# EAGLE board LibreServo_v1_b (EAGLE 9.2.0)
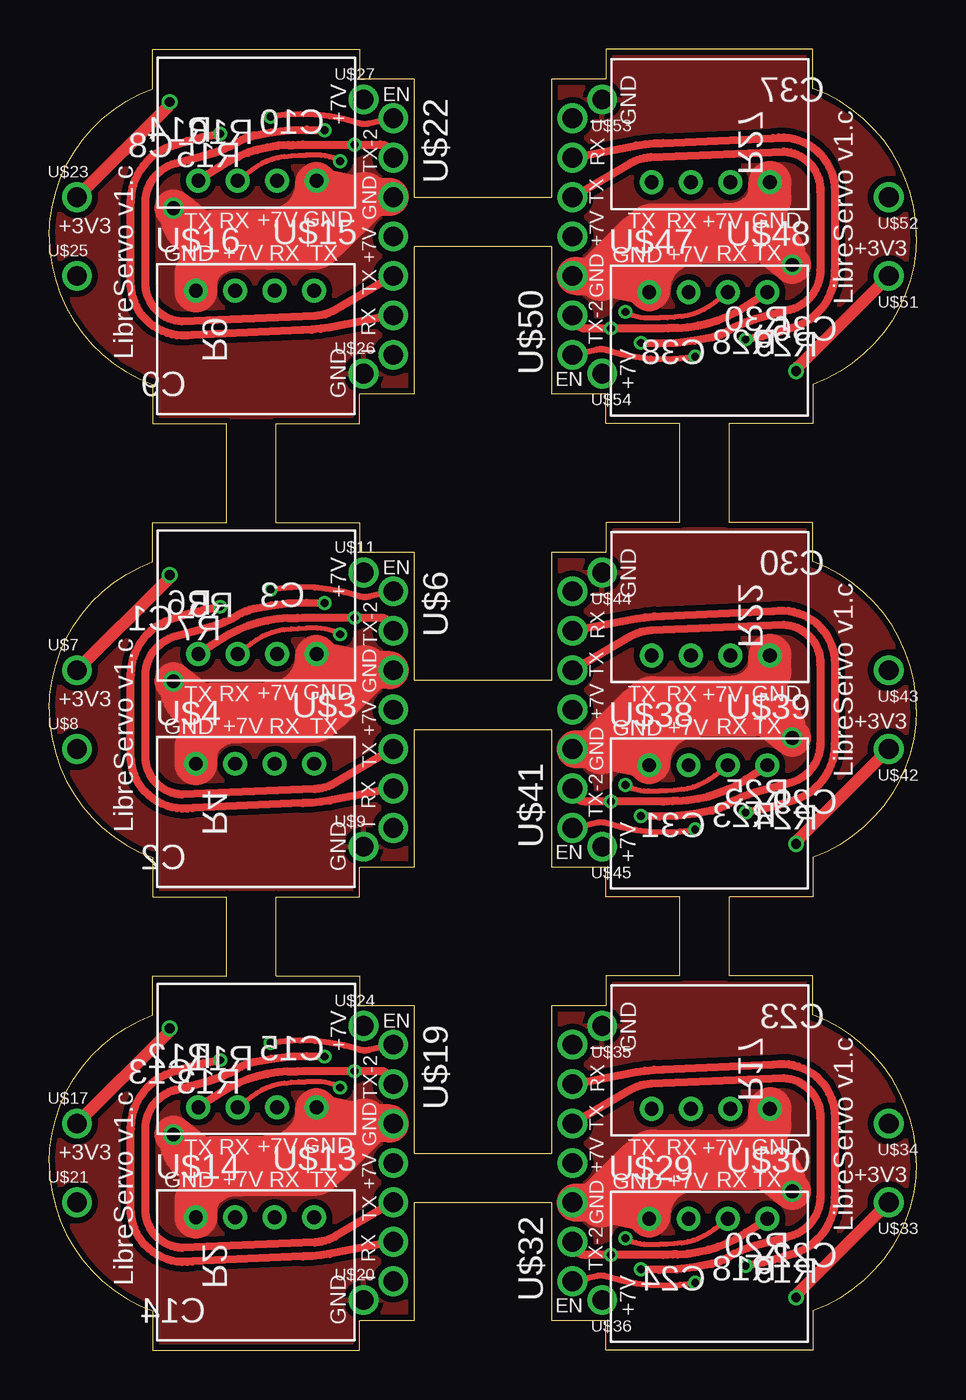
[diagram p0: board, top side]
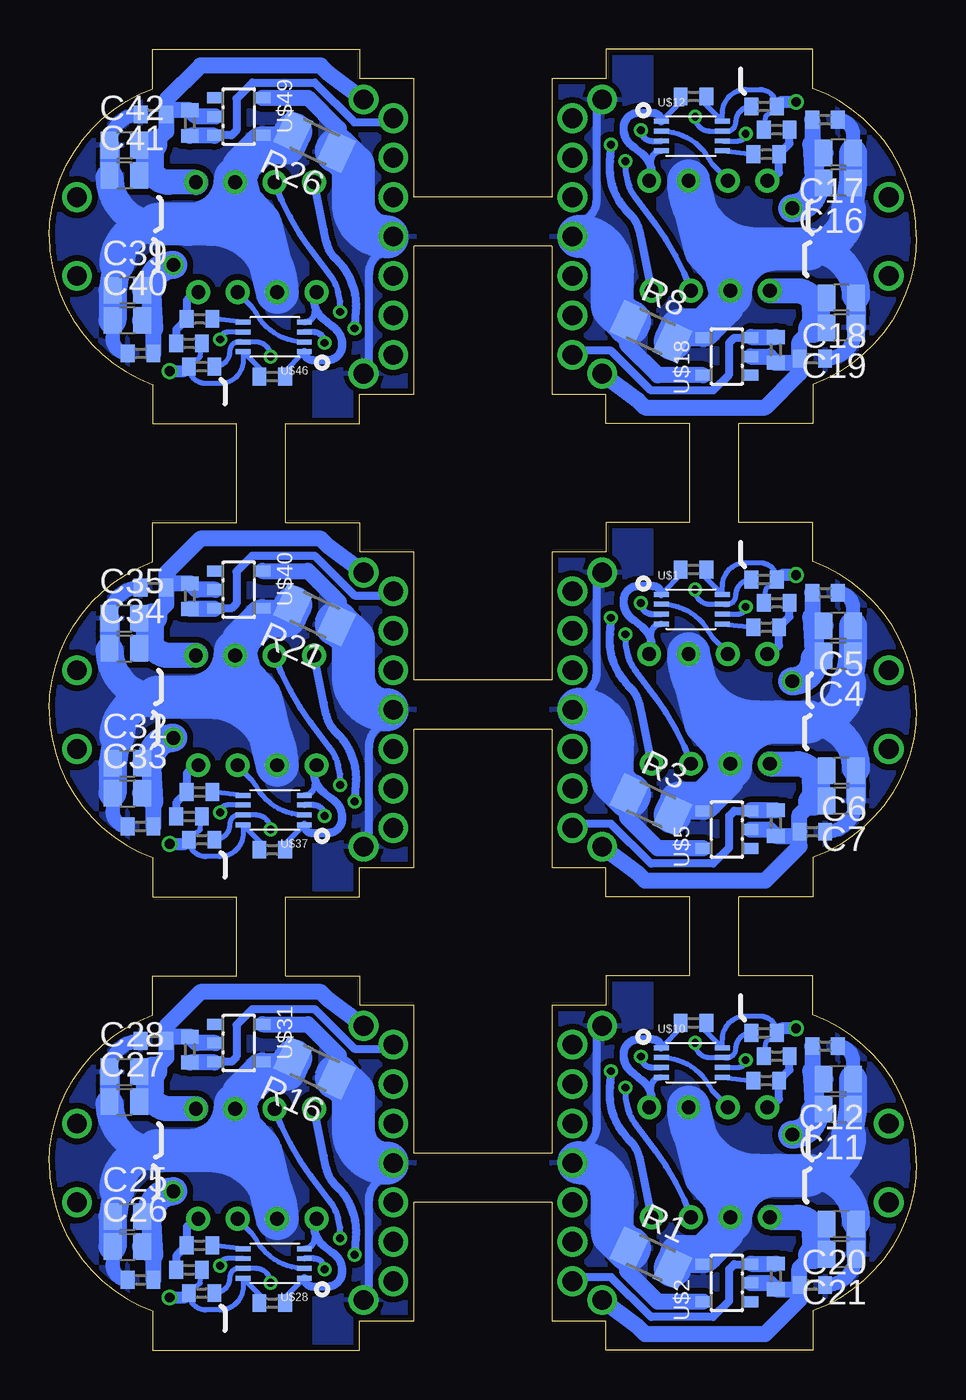
[diagram p1: board, bottom side, seen from below]

Size 44 x 66 mm. Coordinates in mm from the lower left corner, seen from the top.
Outline: 15.75,17.5 18.5,17.5 18.5,10 25.5,10 25.5,17.5 28.25,17.5 28.25,19 32,19 32,23 28.25,23 28.25,24.5 25.5,24.5 25.5,31.5 18.5,31.5 18.5,24.5 15.75,24.5 15.75,23 11.5,23 11.5,19 15.75,19 15.75,17.5
Outline: 18.5,7.5 18.5,1.5 15.75,1.5 15.75,0 5.25,0 5.25,2 arc-70 0,9.5 arc-70 5.25,17 5.25,19 9,19 9,23 5.25,23 5.25,25 arc-70 0,32.5 arc-70 5.25,40 5.25,42 9,42 9,47 5.25,47 5.25,49 arc-70 0,56.5 arc-70 5.25,64 5.25,66 15.75,66 15.75,64.5 18.5,64.5 18.5,58.5 25.5,58.5 25.5,64.5 28.25,64.5 28.25,66 38.75,66 38.75,64 arc-70 44,56.5 arc-70 38.75,49 38.75,47 34.5,47 34.5,42 38.75,42 38.75,40 arc-70 44,32.5 arc-70 38.75,25 38.75,23 34.5,23 34.5,19 38.75,19 38.75,17 arc-70 44,9.5 arc-70 38.75,2 38.75,0 28.25,0 28.25,1.5 25.5,1.5 25.5,7.5 18.5,7.5
Outline: 15.75,40.5 18.5,40.5 18.5,34 25.5,34 25.5,40.5 28.25,40.5 28.25,42 32,42 32,47 28.25,47 28.25,48.5 25.5,48.5 25.5,56 18.5,56 18.5,48.5 15.75,48.5 15.75,47 11.5,47 11.5,42 15.75,42 15.75,40.5
Copper layers (1*16): Top 0.035mm / dielectric 1.5mm / Bottom 0.035mm
Design rules "ITEADstudio_DRC": minimum track width 6mil, minimum drill 12mil, track to track 6mil, track to pad 6mil, pad to pad 6mil, via to via 6mil, smd to smd 0mil, copper to edge 10mil, drill to drill 10mil, minimum pad ring 10mil, minimum via ring 6mil, stop-mask expansion 2mil, vias tented up to drill 100mil, thermal gap 10mil

## Footprints (pad centres in the part's own frame; a part is rotated, then mirrored left to right if it is on the bottom)
C0402 = smd 0.7 x 0.9: 1 -0.65,0; 2 0.65,0
0805_MIN = smd 0.9 x 1.35: 1 -0.75,0; 2 0.75,0
1206_ESTRECHA = smd 1.4 x 1.8: 1 -1.2,0; 2 1.2,0
R0402 = smd 0.7 x 0.9: 1 -0.65,0; 2 0.65,0
VSSOP-8 = smd 0.75 x 0.25: P$1 -1.55,0.75; P$2 -1.55,0.25; P$3 -1.55,-0.25; P$4 -1.55,-0.75; P$5 1.55,-0.75; P$6 1.55,-0.25; P$7 1.55,0.25; P$8 1.55,0.75
SOT25 = smd 0.55 x 0.8: 1 -0.95,-1.2; 2 0,-1.2; 3 0.95,-1.2; 4 0.95,1.2; 5 -0.95,1.2
JST_PH-4_HOLE = drill 0.7: P$1 1.95,6.25; P$2 3.95,6.25; P$3 5.95,6.25; P$4 7.95,6.25
HEADER_7_MIN = drill 1: P$1 0,0; P$2 2,0; P$3 4,0; P$4 6,0; P$5 8,0; P$6 10,0; P$7 12,0
HEADER_1_MIN = drill 1: P$1 0,0

## Placement (x,y rotation side)
C1  100nF  [C0402]  4.64,38.43 180 bottom
C2  100nF  [C0402]  5.28,26.3 180 bottom
C3  100nF  [C0402]  11.31,39.61 180 bottom
C4  22uF  [0805_MIN]  3.96,35.22 180 bottom
C5  22uF  [0805_MIN]  3.96,36.75 180 bottom
C6  22uF  [0805_MIN]  3.81,29.39 180 bottom
C7  22uF  [0805_MIN]  3.81,27.87 180 bottom
C8  100nF  [C0402]  4.64,62.43 180 bottom
C9  100nF  [C0402]  5.28,50.3 180 bottom
C10  100nF  [C0402]  11.31,63.61 180 bottom
C11  22uF  [0805_MIN]  3.96,12.22 180 bottom
C12  22uF  [0805_MIN]  3.96,13.75 180 bottom
C13  100nF  [C0402]  4.64,15.43 180 bottom
C14  100nF  [C0402]  5.28,3.3 180 bottom
C15  100nF  [C0402]  11.31,16.61 180 bottom
C16  22uF  [0805_MIN]  3.96,59.22 180 bottom
C17  22uF  [0805_MIN]  3.96,60.75 180 bottom
C18  22uF  [0805_MIN]  3.81,53.39 180 bottom
C19  22uF  [0805_MIN]  3.81,51.87 180 bottom
C20  22uF  [0805_MIN]  3.81,6.39 180 bottom
C21  22uF  [0805_MIN]  3.81,4.87 180 bottom
C22  100nF  [C0402]  39.36,3.57 0 bottom
C23  100nF  [C0402]  38.72,15.7 0 bottom
C24  100nF  [C0402]  32.69,2.39 0 bottom
C25  22uF  [0805_MIN]  40.04,6.78 0 bottom
C26  22uF  [0805_MIN]  40.04,5.25 0 bottom
C27  22uF  [0805_MIN]  40.19,12.61 0 bottom
C28  22uF  [0805_MIN]  40.19,14.13 0 bottom
C29  100nF  [C0402]  39.36,26.57 0 bottom
C30  100nF  [C0402]  38.72,38.7 0 bottom
C31  100nF  [C0402]  32.69,25.39 0 bottom
C32  22uF  [0805_MIN]  40.04,29.78 0 bottom
C33  22uF  [0805_MIN]  40.04,28.25 0 bottom
C34  22uF  [0805_MIN]  40.19,35.61 0 bottom
C35  22uF  [0805_MIN]  40.19,37.13 0 bottom
C36  100nF  [C0402]  39.36,50.57 0 bottom
C37  100nF  [C0402]  38.72,62.7 0 bottom
C38  100nF  [C0402]  32.69,49.39 0 bottom
C39  22uF  [0805_MIN]  40.04,53.78 0 bottom
C40  22uF  [0805_MIN]  40.04,52.25 0 bottom
C41  22uF  [0805_MIN]  40.19,59.61 0 bottom
C42  22uF  [0805_MIN]  40.19,61.13 0 bottom
R1  0.02  [1206_ESTRECHA]  13.47,4.68 335 bottom
R2  1k1  [R0402]  7.14,3.75 90 bottom
R3  0.02  [1206_ESTRECHA]  13.47,27.68 335 bottom
R4  1k1  [R0402]  7.14,26.75 90 bottom
R5  10K  [R0402]  7.73,39.1 180 bottom
R6  100  [R0402]  7.62,36.68 0 bottom
R7  100K  [R0402]  7.09,37.92 180 bottom
R8  0.02  [1206_ESTRECHA]  13.47,51.68 335 bottom
R9  1k1  [R0402]  7.14,50.75 90 bottom
R10  10K  [R0402]  7.73,63.1 180 bottom
R11  10K  [R0402]  7.73,16.1 180 bottom
R12  100  [R0402]  7.62,13.68 0 bottom
R13  100K  [R0402]  7.09,14.92 180 bottom
R14  100  [R0402]  7.62,60.68 0 bottom
R15  100K  [R0402]  7.09,61.92 180 bottom
R16  0.02  [1206_ESTRECHA]  30.53,14.32 155 bottom
R17  1k1  [R0402]  36.86,15.25 270 bottom
R18  10K  [R0402]  36.27,2.9 0 bottom
R19  100  [R0402]  36.38,5.32 180 bottom
R20  100K  [R0402]  36.91,4.08 0 bottom
R21  0.02  [1206_ESTRECHA]  30.53,37.32 155 bottom
R22  1k1  [R0402]  36.86,38.25 270 bottom
R23  10K  [R0402]  36.27,25.9 0 bottom
R24  100  [R0402]  36.38,28.32 180 bottom
R25  100K  [R0402]  36.91,27.08 0 bottom
R26  0.02  [1206_ESTRECHA]  30.53,61.32 155 bottom
R27  1k1  [R0402]  36.86,62.25 270 bottom
R28  10K  [R0402]  36.27,49.9 0 bottom
R29  100  [R0402]  36.38,52.32 180 bottom
R30  100K  [R0402]  36.91,51.08 0 bottom
U$1  SN74LVC2G125  [VSSOP-8]  11.39,37.6 0 bottom
U$2  ZXCT1010  [SOT25]  9.62,3.41 90 bottom
U$3  JST_PH-4  [JST_PH-4_HOLE]  15.51,41.58 180 top
U$4  JST_PH-4  [JST_PH-4_HOLE]  5.49,23.5 0 top
U$5  ZXCT1010  [SOT25]  9.62,26.41 90 bottom
U$6  HEADER_7_MIN  [HEADER_7_MIN]  17.45,38.5 270 top
U$7  HEADER_1_MIN  [HEADER_1_MIN]  1.4,34.5 0 top
U$8  HEADER_1_MIN  [HEADER_1_MIN]  1.4,30.5 0 top
U$9  HEADER_1_MIN  [HEADER_1_MIN]  15.95,25.55 0 top
U$10  SN74LVC2G125  [VSSOP-8]  11.39,14.6 0 bottom
U$11  HEADER_1_MIN  [HEADER_1_MIN]  15.95,39.45 0 top
U$12  SN74LVC2G125  [VSSOP-8]  11.39,61.6 0 bottom
U$13  JST_PH-4  [JST_PH-4_HOLE]  15.51,18.58 180 top
U$14  JST_PH-4  [JST_PH-4_HOLE]  5.49,0.5 0 top
U$15  JST_PH-4  [JST_PH-4_HOLE]  15.51,65.58 180 top
U$16  JST_PH-4  [JST_PH-4_HOLE]  5.49,47.5 0 top
U$17  HEADER_1_MIN  [HEADER_1_MIN]  1.4,11.5 0 top
U$18  ZXCT1010  [SOT25]  9.62,50.41 90 bottom
U$19  HEADER_7_MIN  [HEADER_7_MIN]  17.45,15.5 270 top
U$20  HEADER_1_MIN  [HEADER_1_MIN]  15.95,2.55 0 top
U$21  HEADER_1_MIN  [HEADER_1_MIN]  1.4,7.5 0 top
U$22  HEADER_7_MIN  [HEADER_7_MIN]  17.45,62.5 270 top
U$23  HEADER_1_MIN  [HEADER_1_MIN]  1.4,58.5 0 top
U$24  HEADER_1_MIN  [HEADER_1_MIN]  15.95,16.45 0 top
U$25  HEADER_1_MIN  [HEADER_1_MIN]  1.4,54.5 0 top
U$26  HEADER_1_MIN  [HEADER_1_MIN]  15.95,49.55 0 top
U$27  HEADER_1_MIN  [HEADER_1_MIN]  15.95,63.45 0 top
U$28  SN74LVC2G125  [VSSOP-8]  32.61,4.4 180 bottom
U$29  JST_PH-4  [JST_PH-4_HOLE]  28.49,0.42 0 top
U$30  JST_PH-4  [JST_PH-4_HOLE]  38.51,18.5 180 top
U$31  ZXCT1010  [SOT25]  34.38,15.59 270 bottom
U$32  HEADER_7_MIN  [HEADER_7_MIN]  26.55,3.5 90 top
U$33  HEADER_1_MIN  [HEADER_1_MIN]  42.6,7.5 180 top
U$34  HEADER_1_MIN  [HEADER_1_MIN]  42.6,11.5 180 top
U$35  HEADER_1_MIN  [HEADER_1_MIN]  28.05,16.45 180 top
U$36  HEADER_1_MIN  [HEADER_1_MIN]  28.05,2.55 180 top
U$37  SN74LVC2G125  [VSSOP-8]  32.61,27.4 180 bottom
U$38  JST_PH-4  [JST_PH-4_HOLE]  28.49,23.42 0 top
U$39  JST_PH-4  [JST_PH-4_HOLE]  38.51,41.5 180 top
U$40  ZXCT1010  [SOT25]  34.38,38.59 270 bottom
U$41  HEADER_7_MIN  [HEADER_7_MIN]  26.55,26.5 90 top
U$42  HEADER_1_MIN  [HEADER_1_MIN]  42.6,30.5 180 top
U$43  HEADER_1_MIN  [HEADER_1_MIN]  42.6,34.5 180 top
U$44  HEADER_1_MIN  [HEADER_1_MIN]  28.05,39.45 180 top
U$45  HEADER_1_MIN  [HEADER_1_MIN]  28.05,25.55 180 top
U$46  SN74LVC2G125  [VSSOP-8]  32.61,51.4 180 bottom
U$47  JST_PH-4  [JST_PH-4_HOLE]  28.49,47.42 0 top
U$48  JST_PH-4  [JST_PH-4_HOLE]  38.51,65.5 180 top
U$49  ZXCT1010  [SOT25]  34.38,62.59 270 bottom
U$50  HEADER_7_MIN  [HEADER_7_MIN]  26.55,50.5 90 top
U$51  HEADER_1_MIN  [HEADER_1_MIN]  42.6,54.5 180 top
U$52  HEADER_1_MIN  [HEADER_1_MIN]  42.6,58.5 180 top
U$53  HEADER_1_MIN  [HEADER_1_MIN]  28.05,63.45 180 top
U$54  HEADER_1_MIN  [HEADER_1_MIN]  28.05,49.55 180 top

## Library data of the parts
C1-C3 C8-C10 C13-C15 C22-C24 C29-C31 C36-C38 R2 R4-R7 R9-R15 R17-R20 R22-R25 R27-R30 = rcl
C4-C7 C11 C12 C16-C21 C25-C28 C32-C35 C39-C42 R1 R3 R8 R16 R21 R26 U$1-U$54 = Propio

## Nets
+3V3_1: C3.1 R5.1 R7.2 U$1.P$8 U$7.P$1
+3V3_2: C15.1 R11.1 R13.2 U$10.P$8 U$17.P$1
+3V3_3: C10.1 R10.1 R15.2 U$12.P$8 U$23.P$1
+3V3_4: C24.1 R18.1 R20.2 U$28.P$8 U$33.P$1
+3V3_5: C31.1 R23.1 R25.2 U$37.P$8 U$42.P$1
+3V3_6: C38.1 R28.1 R30.2 U$46.P$8 U$51.P$1
+7V_1: R3.1 U$5.5 U$6.P$4 U$11.P$1
+7V_2: R1.1 U$2.5 U$19.P$4 U$24.P$1
+7V_2_CABLE: C11.1 C12.1 C13.1 C14.1 C20.1 C21.1 R1.2 U$2.4 U$13.P$2 U$14.P$2
+7V_2_CABLE1: C1.1 C2.1 C4.1 C5.1 C6.1 C7.1 R3.2 U$3.P$2 U$4.P$2 U$5.4
+7V_2_CABLE2: C8.1 C9.1 C16.1 C17.1 C18.1 C19.1 R8.2 U$15.P$2 U$16.P$2 U$18.4
+7V_2_CABLE3: C22.1 C23.1 C25.1 C26.1 C27.1 C28.1 R16.2 U$29.P$2 U$30.P$2 U$31.4
+7V_2_CABLE4: C29.1 C30.1 C32.1 C33.1 C34.1 C35.1 R21.2 U$38.P$2 U$39.P$2 U$40.4
+7V_2_CABLE5: C36.1 C37.1 C39.1 C40.1 C41.1 C42.1 R26.2 U$47.P$2 U$48.P$2 U$49.4
+7V_3: R8.1 U$18.5 U$22.P$4 U$27.P$1
+7V_4: R16.1 U$31.5 U$32.P$4 U$36.P$1
+7V_5: R21.1 U$40.5 U$41.P$4 U$45.P$1
+7V_6: R26.1 U$49.5 U$50.P$4 U$54.P$1
EN_SERIAL_1: R5.2 U$1.P$7 U$6.P$1
EN_SERIAL_2: R11.2 U$10.P$7 U$19.P$1
EN_SERIAL_3: R10.2 U$12.P$7 U$22.P$1
EN_SERIAL_4: R18.2 U$28.P$7 U$32.P$1
EN_SERIAL_5: R23.2 U$37.P$7 U$41.P$1
EN_SERIAL_6: R28.2 U$46.P$7 U$50.P$1
GND1: C1.2 C2.2 C3.2 C4.2 C5.2 C6.2 C7.2 R4.1 U$1.P$1 U$1.P$4 U$3.P$1 U$4.P$1 U$5.2 U$6.P$3 U$9.P$1
GND2: C11.2 C12.2 C13.2 C14.2 C15.2 C20.2 C21.2 R2.1 U$2.2 U$10.P$1 U$10.P$4 U$13.P$1 U$14.P$1 U$19.P$3 U$20.P$1
GND3: C8.2 C9.2 C10.2 C16.2 C17.2 C18.2 C19.2 R9.1 U$12.P$1 U$12.P$4 U$15.P$1 U$16.P$1 U$18.2 U$22.P$3 U$26.P$1
GND4: C22.2 C23.2 C24.2 C25.2 C26.2 C27.2 C28.2 R17.1 U$28.P$1 U$28.P$4 U$29.P$1 U$30.P$1 U$31.2 U$32.P$3 U$35.P$1
GND5: C29.2 C30.2 C31.2 C32.2 C33.2 C34.2 C35.2 R22.1 U$37.P$1 U$37.P$4 U$38.P$1 U$39.P$1 U$40.2 U$41.P$3 U$44.P$1
GND6: C36.2 C37.2 C38.2 C39.2 C40.2 C41.2 C42.2 R27.1 U$46.P$1 U$46.P$4 U$47.P$1 U$48.P$1 U$49.2 U$50.P$3 U$53.P$1
N$1: R6.1 U$1.P$5
N$2: R14.1 U$12.P$5
N$3: R19.1 U$28.P$5
N$4: R24.1 U$37.P$5
N$5: R29.1 U$46.P$5
N$8: R12.1 U$10.P$5
RX_1: U$1.P$6 U$6.P$6
RX_2: U$10.P$6 U$19.P$6
RX_2_CABLE: U$10.P$2 U$13.P$3 U$14.P$3
RX_2_CABLE1: U$1.P$2 U$3.P$3 U$4.P$3
RX_2_CABLE2: U$12.P$2 U$15.P$3 U$16.P$3
RX_2_CABLE3: U$28.P$2 U$29.P$3 U$30.P$3
RX_2_CABLE4: U$37.P$2 U$38.P$3 U$39.P$3
RX_2_CABLE5: U$46.P$2 U$47.P$3 U$48.P$3
RX_3: U$12.P$6 U$22.P$6
RX_4: U$28.P$6 U$32.P$6
RX_5: U$37.P$6 U$41.P$6
RX_6: U$46.P$6 U$50.P$6
TX_1: U$1.P$3 U$6.P$5
TX_2: U$10.P$3 U$19.P$5
TX_2_CABLE: R12.2 R13.1 U$13.P$4 U$14.P$4 U$19.P$2
TX_2_CABLE1: R6.2 R7.1 U$3.P$4 U$4.P$4 U$6.P$2
TX_2_CABLE2: R14.2 R15.1 U$15.P$4 U$16.P$4 U$22.P$2
TX_2_CABLE3: R19.2 R20.1 U$29.P$4 U$30.P$4 U$32.P$2
TX_2_CABLE4: R24.2 R25.1 U$38.P$4 U$39.P$4 U$41.P$2
TX_2_CABLE5: R29.2 R30.1 U$47.P$4 U$48.P$4 U$50.P$2
TX_3: U$12.P$3 U$22.P$5
TX_4: U$28.P$3 U$32.P$5
TX_5: U$37.P$3 U$41.P$5
TX_6: U$46.P$3 U$50.P$5
V_CORRIENTE_1: R4.2 U$5.3 U$6.P$7
V_CORRIENTE_2: R2.2 U$2.3 U$19.P$7
V_CORRIENTE_3: R9.2 U$18.3 U$22.P$7
V_CORRIENTE_4: R17.2 U$31.3 U$32.P$7
V_CORRIENTE_5: R22.2 U$40.3 U$41.P$7
V_CORRIENTE_6: R27.2 U$49.3 U$50.P$7
V_POT_1: U$8.P$1
V_POT_2: U$21.P$1
V_POT_3: U$25.P$1
V_POT_4: U$34.P$1
V_POT_5: U$43.P$1
V_POT_6: U$52.P$1

## Tracks (layer width: path | path; a pad name or v marks a point on that pad's centre or on a via)
+3V3_1  (via drill 0.5)
  Top 0.61: U$7.P$1 6.07,39.17 6.07,39.29 v6.1,39.32
  Bottom 0.254: C3.1 10.88,39.38 U$1.P$8 9.84,38.78 arc90 8.66,39.95 7.94,39.95 arc90 R5.1 7.66,38.58 R7.2
  Bottom 0.61: v6.1,39.32 6.86,39.32 R5.1
+3V3_2  (via drill 0.5)
  Top 0.61: U$17.P$1 6.07,16.17 6.07,16.29 v6.1,16.32
  Bottom 0.254: C15.1 10.88,16.38 U$10.P$8 9.84,15.78 arc90 8.66,16.95 7.94,16.95 arc90 R11.1 7.66,15.58 R13.2
  Bottom 0.61: v6.1,16.32 6.86,16.32 R11.1
+3V3_3  (via drill 0.5)
  Top 0.61: U$23.P$1 6.07,63.17 6.07,63.29 v6.1,63.32
  Bottom 0.254: C10.1 10.88,63.38 U$12.P$8 9.84,62.78 arc90 8.66,63.95 7.94,63.95 arc90 R10.1 7.66,62.58 R15.2
  Bottom 0.61: v6.1,63.32 6.86,63.32 R10.1
+3V3_4  (via drill 0.5)
  Top 0.61: U$33.P$1 37.93,2.83 37.93,2.71 v37.9,2.68
  Bottom 0.254: C24.1 33.12,2.62 U$28.P$8 34.16,3.22 arc90 35.34,2.05 36.06,2.05 arc90 R18.1 36.34,3.42 R20.2
  Bottom 0.61: v37.9,2.68 37.14,2.68 R18.1
+3V3_5  (via drill 0.5)
  Top 0.61: U$42.P$1 37.93,25.83 37.93,25.71 v37.9,25.68
  Bottom 0.254: C31.1 33.12,25.62 U$37.P$8 34.16,26.22 arc90 35.34,25.05 36.06,25.05 arc90 R23.1 36.34,26.42 R25.2
  Bottom 0.61: v37.9,25.68 37.14,25.68 R23.1
+3V3_6  (via drill 0.5)
  Top 0.61: U$51.P$1 37.93,49.83 37.93,49.71 v37.9,49.68
  Bottom 0.254: C38.1 33.12,49.62 U$46.P$8 34.16,50.22 arc90 35.34,49.05 36.06,49.05 arc90 R28.1 36.34,50.42 R30.2
  Bottom 0.61: v37.9,49.68 37.14,49.68 R28.1
+7V_1
  Bottom 0.406: U$11.P$1 16.23,39.17 16.23,34.37 arc90 17.48,33.12 17.48,32.53 arc-90 U$6.P$4 17.16,32.5 arc-90 17.15,32.51
  Bottom 0.813: U$5.5 13.12,25.46 14.68,27.02 R3.1
  Bottom 1.422: U$6.P$4 17.24,32.5
  Bottom 2.184: 17.15,32.51 arc90 15.42,30.79 15.42,28.91 14.59,28.07 R3.1
  pour Bottom (isolate 0.305): 13.5,23 15.5,23 15.5,25 18.5,25 18.5,40 18.5,41 15.5,41 15.5,42 13.5,42
+7V_2
  Bottom 0.406: U$24.P$1 16.23,16.17 16.23,11.37 arc90 17.48,10.12 17.48,9.53 arc-90 U$19.P$4 17.16,9.5 arc-90 17.15,9.51
  Bottom 0.813: U$2.5 13.12,2.46 14.68,4.03 R1.1
  Bottom 1.422: U$19.P$4 17.24,9.5
  Bottom 2.184: 17.15,9.51 arc90 15.42,7.79 15.42,5.91 14.59,5.08 R1.1
  pour Bottom (isolate 0.305): 13.5,0 15.5,0 15.5,2 18.5,2 18.5,17 18.5,18 15.5,18 15.5,19 13.5,19
+7V_2_CABLE
  Bottom 0.711: C14.1 C14.1 arc-90 C21.1 | C12.1 3.21,14.65 arc-90 C13.1
  Bottom 0.813: R1.2 11.26,4.81 U$2.4
  Bottom 1.016: 3.06,6.5 C20.1 C21.1
  Bottom 1.422: 3.06,6.5 arc-90 5.44,8.88 | 3.43,10.88 C11.1 C12.1
  Bottom 1.676: 5.46,8.88 5.44,8.88
  Bottom 1.778: 5.44,8.88 arc-90 3.43,10.88
  Bottom 1.93: R1.2 12.06,4.88 10.8,4.88 9.71,5.96 9.71,6.12 9.55,6.29 9.44,6.55 U$14.P$2
  Bottom 2.184: 6.96,8.88 8.11,8.88 arc90 U$13.P$2 10.69,8.82 9.69,7.72 U$14.P$2 | 6.96,8.88 5.46,8.88 | 9.44,6.55 arc90 7.11,8.88 6.96,8.88
  pour Bottom (isolate 0.305, rank 2): 5.25,17 arc70 0,9.5 arc70 5.25,2 5.25,0 13.06,0 13.06,4.19 13.06,14.81 13.06,19 5.25,19
+7V_2_CABLE1
  Bottom 0.711: C2.1 C2.1 arc-90 C7.1 | C5.1 3.21,37.65 arc-90 C1.1
  Bottom 0.813: R3.2 11.26,27.81 U$5.4
  Bottom 1.016: 3.06,29.5 C6.1 C7.1
  Bottom 1.422: 3.06,29.5 arc-90 5.44,31.88 | 3.43,33.88 C4.1 C5.1
  Bottom 1.676: 5.46,31.88 5.44,31.88
  Bottom 1.778: 5.44,31.88 arc-90 3.43,33.88
  Bottom 1.93: R3.2 12.06,27.88 10.8,27.88 9.71,28.96 9.71,29.12 9.55,29.29 9.44,29.55 U$4.P$2
  Bottom 2.184: 6.96,31.88 8.11,31.88 arc90 U$3.P$2 10.69,31.82 9.69,30.72 U$4.P$2 | 6.96,31.88 5.46,31.88 | 9.44,29.55 arc90 7.11,31.88 6.96,31.88
  pour Bottom (isolate 0.305, rank 2): 5.25,40 arc70 0,32.5 arc70 5.25,25 5.28,23.46 13.08,23.46 13.06,27.19 13.06,42 5.25,42
+7V_2_CABLE2
  Bottom 0.711: C9.1 C9.1 arc-90 C19.1 | C17.1 3.21,61.65 arc-90 C8.1
  Bottom 0.813: R8.2 11.26,51.81 U$18.4
  Bottom 1.016: 3.06,53.5 C18.1 C19.1
  Bottom 1.422: 3.06,53.5 arc-90 5.44,55.88 | 3.43,57.88 C16.1 C17.1
  Bottom 1.676: 5.46,55.88 5.44,55.88
  Bottom 1.778: 5.44,55.88 arc-90 3.43,57.88
  Bottom 1.93: R8.2 12.06,51.88 10.8,51.88 9.71,52.96 9.71,53.12 9.55,53.29 9.44,53.55 U$16.P$2
  Bottom 2.184: 6.96,55.88 8.11,55.88 arc90 U$15.P$2 10.69,55.82 9.69,54.72 U$16.P$2 | 6.96,55.88 5.46,55.88 | 9.44,53.55 arc90 7.11,55.88 6.96,55.88
  pour Bottom (isolate 0.305, rank 2): 5.25,64 arc70 0,56.5 arc70 5.25,49 5.33,47.33 13.13,47.33 13.06,51.19 13.06,66 5.25,66
+7V_2_CABLE3
  Bottom 0.711: C23.1 C23.1 arc-90 C28.1 | C26.1 40.79,4.35 arc-90 C22.1
  Bottom 0.813: R16.2 32.74,14.19 U$31.4
  Bottom 1.016: 40.94,12.5 C27.1 C28.1
  Bottom 1.422: 40.94,12.5 arc-90 38.56,10.12 | 40.57,8.12 C25.1 C26.1
  Bottom 1.676: 38.54,10.12 38.56,10.12
  Bottom 1.778: 38.56,10.12 arc-90 40.57,8.12
  Bottom 1.93: R16.2 31.94,14.12 33.2,14.12 34.28,13.04 34.28,12.88 34.45,12.71 34.56,12.45 U$30.P$2
  Bottom 2.184: 37.04,10.12 35.89,10.12 arc90 U$29.P$2 33.31,10.18 34.31,11.28 U$30.P$2 | 37.04,10.12 38.54,10.12 | 34.56,12.45 arc90 36.89,10.12 37.04,10.12
  pour Bottom (isolate 0.305, rank 2): 38.75,2 arc70 44,9.5 arc70 38.75,17 38.7,18.64 30.89,18.64 30.94,14.81 30.94,0 38.75,0
+7V_2_CABLE4
  Bottom 0.711: C30.1 C30.1 arc-90 C35.1 | C33.1 40.79,27.35 arc-90 C29.1
  Bottom 0.813: R21.2 32.74,37.19 U$40.4
  Bottom 1.016: 40.94,35.5 C34.1 C35.1
  Bottom 1.422: 40.94,35.5 arc-90 38.56,33.12 | 40.57,31.12 C32.1 C33.1
  Bottom 1.676: 38.54,33.12 38.56,33.12
  Bottom 1.778: 38.56,33.12 arc-90 40.57,31.12
  Bottom 1.93: R21.2 31.94,37.12 33.2,37.12 34.28,36.04 34.28,35.88 34.45,35.71 34.56,35.45 U$39.P$2
  Bottom 2.184: 37.04,33.12 35.89,33.12 arc90 U$38.P$2 33.31,33.18 34.31,34.28 U$39.P$2 | 37.04,33.12 38.54,33.12 | 34.56,35.45 arc90 36.89,33.12 37.04,33.12
  pour Bottom (isolate 0.305, rank 2): 38.75,25 arc70 44,32.5 arc70 38.75,40 38.78,41.62 30.97,41.62 30.94,37.81 30.94,23 38.75,23
+7V_2_CABLE5
  Bottom 0.711: C37.1 C37.1 arc-90 C42.1 | C40.1 40.79,51.35 arc-90 C36.1
  Bottom 0.813: R26.2 32.74,61.19 U$49.4
  Bottom 1.016: 40.94,59.5 C41.1 C42.1
  Bottom 1.422: 40.94,59.5 arc-90 38.56,57.12 | 40.57,55.12 C39.1 C40.1
  Bottom 1.676: 38.54,57.12 38.56,57.12
  Bottom 1.778: 38.56,57.12 arc-90 40.57,55.12
  Bottom 1.93: R26.2 31.94,61.12 33.2,61.12 34.28,60.04 34.28,59.88 34.45,59.71 34.56,59.45 U$48.P$2
  Bottom 2.184: 37.04,57.12 35.89,57.12 arc90 U$47.P$2 33.31,57.18 34.31,58.28 U$48.P$2 | 37.04,57.12 38.54,57.12 | 34.56,59.45 arc90 36.89,57.12 37.04,57.12
  pour Bottom (isolate 0.305, rank 2): 38.75,49 arc70 44,56.5 arc70 38.75,64 38.75,66 30.94,66 30.94,61.81 30.94,51.19 30.94,47 38.75,47
+7V_3
  Bottom 0.406: U$27.P$1 16.23,63.17 16.23,58.37 arc90 17.48,57.12 17.48,56.53 arc-90 U$22.P$4 17.16,56.5 arc-90 17.15,56.51
  Bottom 0.813: U$18.5 13.12,49.46 14.68,51.02 R8.1
  Bottom 1.422: U$22.P$4 17.24,56.5
  Bottom 2.184: 17.15,56.51 arc90 15.42,54.78 15.42,52.91 14.59,52.08 R8.1
  pour Bottom (isolate 0.305): 13.5,47 15.5,47 15.5,49 18.5,49 18.5,64 18.5,65 15.5,65 15.5,66 13.5,66
+7V_4
  Bottom 0.406: U$36.P$1 27.77,2.83 27.77,7.63 arc90 26.52,8.88 26.52,9.47 arc-90 U$32.P$4 26.84,9.5 arc-90 26.85,9.49
  Bottom 0.813: U$31.5 30.88,16.54 29.32,14.97 R16.1
  Bottom 1.422: U$32.P$4 26.76,9.5
  Bottom 2.184: 26.85,9.49 arc90 28.58,11.21 28.58,13.1 29.41,13.93 R16.1
  pour Bottom (isolate 0.305): 30.5,19 28.5,19 28.5,17 25.5,17 25.5,2 25.5,1 28.5,1 28.5,0 30.5,0
+7V_5
  Bottom 0.406: U$45.P$1 27.77,25.83 27.77,30.63 arc90 26.52,31.88 26.52,32.47 arc-90 U$41.P$4 26.84,32.5 arc-90 26.85,32.49
  Bottom 0.813: U$40.5 30.88,39.54 29.32,37.98 R21.1
  Bottom 1.422: U$41.P$4 26.76,32.5
  Bottom 2.184: 26.85,32.49 arc90 28.58,34.22 28.58,36.09 29.41,36.92 R21.1
  pour Bottom (isolate 0.305): 30.5,42 28.5,42 28.5,40 25.5,40 25.5,25 25.5,24 28.5,24 28.5,23 30.5,23
+7V_6
  Bottom 0.406: U$54.P$1 27.77,49.83 27.77,54.63 arc90 26.52,55.88 26.52,56.47 arc-90 U$50.P$4 26.84,56.5 arc-90 26.85,56.49
  Bottom 0.813: U$49.5 30.88,63.54 29.32,61.98 R26.1
  Bottom 1.422: U$50.P$4 26.76,56.5
  Bottom 2.184: 26.85,56.49 arc90 28.58,58.22 28.58,60.09 29.41,60.92 R26.1
  pour Bottom (isolate 0.305): 30.5,66 28.5,66 28.5,64 25.5,64 25.5,49 25.5,48 28.5,48 28.5,47 30.5,47
EN_SERIAL_1  (via drill 0.4)
  Top 0.305: U$6.P$1 16.23,38.23 arc-31 15.7,38.25 arc28 v11.23,38.58
  Bottom 0.254: R5.2 R5.2 arc-90 9.17,38.3 arc110 9.82,37.85 U$1.P$7 10.5,37.85 arc90 v11.23,38.58
EN_SERIAL_2  (via drill 0.4)
  Top 0.305: U$19.P$1 16.23,15.23 arc-31 15.7,15.25 arc28 v11.23,15.58
  Bottom 0.254: R11.2 R11.2 arc-90 9.17,15.3 arc110 9.82,14.85 U$10.P$7 10.5,14.85 arc90 v11.23,15.58
EN_SERIAL_3  (via drill 0.4)
  Top 0.305: U$22.P$1 16.23,62.23 arc-31 15.7,62.25 arc28 v11.23,62.58
  Bottom 0.254: R10.2 R10.2 arc-90 9.17,62.3 arc110 9.82,61.85 U$12.P$7 10.5,61.85 arc90 v11.23,62.58
EN_SERIAL_4  (via drill 0.4)
  Top 0.305: U$32.P$1 27.77,3.77 arc-31 28.3,3.75 arc28 v32.77,3.42
  Bottom 0.254: R18.2 R18.2 arc-90 34.83,3.7 arc110 34.18,4.15 U$28.P$7 33.5,4.15 arc90 v32.77,3.42
EN_SERIAL_5  (via drill 0.4)
  Top 0.305: U$41.P$1 27.77,26.77 arc-31 28.3,26.75 arc28 v32.77,26.42
  Bottom 0.254: R23.2 R23.2 arc-90 34.83,26.7 arc110 34.18,27.15 U$37.P$7 33.5,27.15 arc90 v32.77,26.42
EN_SERIAL_6  (via drill 0.4)
  Top 0.305: U$50.P$1 27.77,50.77 arc-31 28.3,50.75 arc28 v32.77,50.42
  Bottom 0.254: R28.2 R28.2 arc-90 34.83,50.7 arc110 34.18,51.15 U$46.P$7 33.5,51.15 arc90 v32.77,50.42
GND1  (via drill 0.7)
  Top 0.254: 13.39,32.33 13.61,32.56
  Top 0.406: U$6.P$3 17.28,34.5
  Top 1.422: 7.99,32.02 arc-90 6.3,33.71 v6.3,33.93 6.3,33.96 | U$3.P$1 U$6.P$3
  Top 1.93: 17.28,34.5 15.98,34.5 | 7.55,30.69 7.55,31.58 7.99,32.02 8.31,32.33 v6.3,33.93 | U$3.P$1 13.56,35.17 | U$4.P$1 arc-90 9.46,31.77 9.78,31.77 11.23,32.36
  Top 2.184: 13.56,35.17 arc-90 11.23,32.84 11.23,32.36 arc-90 11.2,32.33 | 7.55,30.69 arc90 7.44,30.57 U$4.P$1
  Top 2.54: 15.98,34.5 14.04,32.56 13.61,32.56
  Top 3.048: 13.39,32.33 11.2,32.33 8.31,32.33
  Bottom 0.254: C3.2 11.84,39.45 U$1.P$1
  Bottom 0.305: C2.2 5.96,26.3 5.97,26.31 6.2,26.54 | U$1.P$4 arc-90 13.45,36.34 13.45,35.84 13.45,35.44 arc90 U$3.P$1
  Bottom 0.406: U$1.P$1 arc-90 13.35,38.76 14.12,38.76 arc-90 14.86,38.02 14.86,37.95 arc-61 14.33,37.03 13.92,36.7 arc61 13.45,35.44
  Bottom 0.711: 5.28,27.82 4.61,27.82 arc-90 C7.2 | 5.11,28.8 5.11,28.84 arc90 C6.2
  Bottom 0.813: C1.2 5.29,37.17 | U$9.P$1 14.15,24.21 13.77,23.82 7.67,23.82 5.93,25.57 C2.2 | C2.2 6.14,26.1 R4.1 7.46,26.41 U$5.2 | C2.2 5.93,27.17 5.28,27.82
  Bottom 1.016: C5.2 5.29,37.17 5.17,35.07 C4.2
  Bottom 1.27: U$4.P$1 6.06,29.75 arc90 5.11,28.8
  Bottom 1.422: 5.17,35.07 arc90 v6.3,33.93 | 5.11,28.84 5.11,27.99 arc90 5.28,27.82
  pour Top (isolate 0.305): 15.75,23.41 5.25,23.41 5.25,25 arc-70 0,32.5 arc-70 5.25,40 5.25,42 15.75,42 15.75,40.5 18.5,40.5 18.5,24.5 15.75,24.5
GND2  (via drill 0.7)
  Top 0.254: 13.39,9.33 13.61,9.56
  Top 0.406: U$19.P$3 17.28,11.5
  Top 1.422: 7.99,9.02 arc-90 6.3,10.71 v6.3,10.93 6.3,10.96 | U$13.P$1 U$19.P$3
  Top 1.93: 17.28,11.5 15.98,11.5 | 7.55,7.69 7.55,8.57 7.99,9.02 8.31,9.33 v6.3,10.93 | U$13.P$1 13.56,12.17 | U$14.P$1 arc-90 9.46,8.78 9.78,8.78 11.23,9.36
  Top 2.184: 13.56,12.17 arc-90 11.23,9.84 11.23,9.36 arc-90 11.2,9.33 | 7.55,7.69 arc90 7.44,7.57 U$14.P$1
  Top 2.54: 15.98,11.5 14.04,9.56 13.61,9.56
  Top 3.048: 13.39,9.33 11.2,9.33 8.31,9.33
  Bottom 0.254: C15.2 11.84,16.45 U$10.P$1
  Bottom 0.305: C14.2 5.96,3.3 5.97,3.31 6.2,3.54 | U$10.P$4 arc-90 13.45,13.34 13.45,12.84 13.45,12.44 arc90 U$13.P$1
  Bottom 0.406: U$10.P$1 arc-90 13.35,15.76 14.12,15.76 arc-90 14.86,15.02 14.86,14.95 arc-61 14.33,14.03 13.92,13.7 arc61 13.45,12.44
  Bottom 0.711: 5.28,4.82 4.61,4.82 arc-90 C21.2 | 5.11,5.8 5.11,5.83 arc90 C20.2
  Bottom 0.813: C13.2 5.29,14.17 | U$20.P$1 14.15,1.21 13.77,0.82 7.67,0.82 5.93,2.57 C14.2 | C14.2 6.14,3.1 R2.1 7.46,3.41 U$2.2 | C14.2 5.93,4.17 5.28,4.82
  Bottom 1.016: C12.2 5.29,14.17 5.17,12.07 C11.2
  Bottom 1.27: U$14.P$1 6.06,6.75 arc90 5.11,5.8
  Bottom 1.422: 5.17,12.07 arc90 v6.3,10.93 | 5.11,5.83 5.11,4.99 arc90 5.28,4.82
  pour Top (isolate 0.305): 15.75,0 5.25,0 5.25,2 arc-70 0,9.5 arc-70 5.25,17 5.25,19 15.75,19 15.75,17.5 18.5,17.5 18.5,1.5 15.75,1.5
GND3  (via drill 0.7)
  Top 0.254: 13.39,56.33 13.61,56.56
  Top 0.406: U$22.P$3 17.28,58.5
  Top 1.422: 7.99,56.02 arc-90 6.3,57.71 v6.3,57.93 6.3,57.96 | U$15.P$1 U$22.P$3
  Top 1.93: 17.28,58.5 15.98,58.5 | 7.55,54.69 7.55,55.58 7.99,56.02 8.31,56.33 v6.3,57.93 | U$15.P$1 13.56,59.17 | U$16.P$1 arc-90 9.46,55.77 9.78,55.77 11.23,56.36
  Top 2.184: 13.56,59.17 arc-90 11.23,56.84 11.23,56.36 arc-90 11.2,56.33 | 7.55,54.69 arc90 7.44,54.57 U$16.P$1
  Top 2.54: 15.98,58.5 14.04,56.56 13.61,56.56
  Top 3.048: 13.39,56.33 11.2,56.33 8.31,56.33
  Bottom 0.254: C10.2 11.84,63.45 U$12.P$1
  Bottom 0.305: C9.2 5.96,50.3 5.97,50.31 6.2,50.54 | U$12.P$4 arc-90 13.45,60.34 13.45,59.84 13.45,59.44 arc90 U$15.P$1
  Bottom 0.406: U$12.P$1 arc-90 13.35,62.76 14.12,62.76 arc-90 14.86,62.02 14.86,61.95 arc-61 14.33,61.03 13.92,60.7 arc61 13.45,59.44
  Bottom 0.711: 5.28,51.82 4.61,51.82 arc-90 C19.2 | 5.11,52.8 5.11,52.84 arc90 C18.2
  Bottom 0.813: C8.2 5.29,61.17 | U$26.P$1 14.15,48.21 13.77,47.83 7.67,47.83 5.93,49.57 C9.2 | C9.2 6.14,50.1 R9.1 7.46,50.41 U$18.2 | C9.2 5.93,51.17 5.28,51.82
  Bottom 1.016: C17.2 5.29,61.17 5.17,59.07 C16.2
  Bottom 1.27: U$16.P$1 6.06,53.75 arc90 5.11,52.8
  Bottom 1.422: 5.17,59.07 arc90 v6.3,57.93 | 5.11,52.84 5.11,51.99 arc90 5.28,51.82
  pour Top (isolate 0.305): 15.75,47.33 5.25,47.33 5.25,49 arc-70 0,56.5 arc-70 5.25,64 5.25,66 15.75,66 15.75,64.5 18.5,64.5 18.5,48.5 15.75,48.5
GND4  (via drill 0.7)
  Top 0.254: 30.61,9.67 30.39,9.44
  Top 0.406: U$32.P$3 26.72,7.5
  Top 1.422: 36.01,9.98 arc-90 37.7,8.29 v37.7,8.07 37.7,8.04 | U$29.P$1 U$32.P$3
  Top 1.93: 26.72,7.5 28.02,7.5 | 36.45,11.31 36.45,10.43 36.01,9.98 35.69,9.67 v37.7,8.07 | U$29.P$1 30.44,6.83 | U$30.P$1 arc-90 34.54,10.22 34.22,10.22 32.77,9.64
  Top 2.184: 30.44,6.83 arc-90 32.77,9.16 32.77,9.64 arc-90 32.8,9.67 | 36.45,11.31 arc90 36.56,11.43 U$30.P$1
  Top 2.54: 28.02,7.5 29.96,9.44 30.39,9.44
  Top 3.048: 30.61,9.67 32.8,9.67 35.69,9.67
  Bottom 0.254: C24.2 32.16,2.55 U$28.P$1
  Bottom 0.305: C23.2 38.04,15.7 38.03,15.69 37.8,15.46 | U$28.P$4 arc-90 30.55,5.66 30.55,6.16 30.55,6.56 arc90 U$29.P$1
  Bottom 0.406: U$28.P$1 arc-90 30.65,3.24 29.88,3.24 arc-90 29.14,3.98 29.14,4.05 arc-61 29.67,4.97 30.08,5.3 arc61 30.55,6.56
  Bottom 0.711: 38.72,14.18 39.39,14.18 arc-90 C28.2 | 38.89,13.2 38.89,13.16 arc90 C27.2
  Bottom 0.813: C22.2 38.72,4.83 | U$35.P$1 29.85,17.79 30.23,18.18 36.33,18.18 38.07,16.43 C23.2 | C23.2 37.86,15.9 R17.1 36.55,15.59 U$31.2 | C23.2 38.07,14.83 38.72,14.18
  Bottom 1.016: C26.2 38.72,4.83 38.83,6.93 C25.2
  Bottom 1.27: U$30.P$1 37.94,12.25 arc90 38.89,13.2
  Bottom 1.422: 38.83,6.93 arc90 v37.7,8.07 | 38.89,13.16 38.89,14.01 arc90 38.72,14.18
  pour Top (isolate 0.305): 28.25,18.64 38.75,18.64 38.75,17 arc-70 44,9.5 arc-70 38.75,2 38.75,0 28.25,0 28.25,1.5 25.5,1.5 25.5,17.5 28.25,17.5
GND5  (via drill 0.7)
  Top 0.254: 30.61,32.67 30.39,32.44
  Top 0.406: U$41.P$3 26.72,30.5
  Top 1.422: 36.01,32.98 arc-90 37.7,31.29 v37.7,31.07 37.7,31.04 | U$38.P$1 U$41.P$3
  Top 1.93: 26.72,30.5 28.02,30.5 | 36.45,34.31 36.45,33.42 36.01,32.98 35.69,32.67 v37.7,31.07 | U$38.P$1 30.44,29.83 | U$39.P$1 arc-90 34.54,33.23 34.22,33.23 32.77,32.64
  Top 2.184: 30.44,29.83 arc-90 32.77,32.16 32.77,32.64 arc-90 32.8,32.67 | 36.45,34.31 arc90 36.56,34.43 U$39.P$1
  Top 2.54: 28.02,30.5 29.96,32.44 30.39,32.44
  Top 3.048: 30.61,32.67 32.8,32.67 35.69,32.67
  Bottom 0.254: C31.2 32.16,25.55 U$37.P$1
  Bottom 0.305: C30.2 38.04,38.7 38.03,38.69 37.8,38.46 | U$37.P$4 arc-90 30.55,28.66 30.55,29.16 30.55,29.56 arc90 U$38.P$1
  Bottom 0.406: U$37.P$1 arc-90 30.65,26.24 29.88,26.24 arc-90 29.14,26.98 29.14,27.05 arc-61 29.67,27.97 30.08,28.3 arc61 30.55,29.56
  Bottom 0.711: 38.72,37.18 39.39,37.18 arc-90 C35.2 | 38.89,36.2 38.89,36.16 arc90 C34.2
  Bottom 0.813: C29.2 38.72,27.83 | U$44.P$1 29.85,40.79 30.23,41.17 36.33,41.17 38.07,39.43 C30.2 | C30.2 37.86,38.9 R22.1 36.55,38.59 U$40.2 | C30.2 38.07,37.83 38.72,37.18
  Bottom 1.016: C33.2 38.72,27.83 38.83,29.93 C32.2
  Bottom 1.27: U$39.P$1 37.94,35.25 arc90 38.89,36.2
  Bottom 1.422: 38.83,29.93 arc90 v37.7,31.07 | 38.89,36.16 38.89,37.01 arc90 38.72,37.18
  pour Top (isolate 0.305): 28.25,41.64 38.75,41.64 38.75,40 arc-70 44,32.5 arc-70 38.75,25 38.75,23 28.25,23 28.25,24.5 25.5,24.5 25.5,40.5 28.25,40.5
GND6  (via drill 0.7)
  Top 0.254: 30.61,56.67 30.39,56.44
  Top 0.406: U$50.P$3 26.72,54.5
  Top 1.422: 36.01,56.98 arc-90 37.7,55.29 v37.7,55.07 37.7,55.04 | U$47.P$1 U$50.P$3
  Top 1.93: 26.72,54.5 28.02,54.5 | 36.45,58.31 36.45,57.42 36.01,56.98 35.69,56.67 v37.7,55.07 | U$47.P$1 30.44,53.83 | U$48.P$1 arc-90 34.54,57.23 34.22,57.23 32.77,56.64
  Top 2.184: 30.44,53.83 arc-90 32.77,56.16 32.77,56.64 arc-90 32.8,56.67 | 36.45,58.31 arc90 36.56,58.43 U$48.P$1
  Top 2.54: 28.02,54.5 29.96,56.44 30.39,56.44
  Top 3.048: 30.61,56.67 32.8,56.67 35.69,56.67
  Bottom 0.254: C38.2 32.16,49.55 U$46.P$1
  Bottom 0.305: C37.2 38.04,62.7 38.03,62.69 37.8,62.46 | U$46.P$4 arc-90 30.55,52.66 30.55,53.16 30.55,53.56 arc90 U$47.P$1
  Bottom 0.406: U$46.P$1 arc-90 30.65,50.24 29.88,50.24 arc-90 29.14,50.98 29.14,51.05 arc-61 29.67,51.97 30.08,52.3 arc61 30.55,53.56
  Bottom 0.711: 38.72,61.18 39.39,61.18 arc-90 C42.2 | 38.89,60.2 38.89,60.16 arc90 C41.2
  Bottom 0.813: C36.2 38.72,51.83 | U$53.P$1 29.85,64.79 30.23,65.17 36.33,65.17 38.07,63.43 C37.2 | C37.2 37.86,62.9 R27.1 36.55,62.59 U$49.2 | C37.2 38.07,61.83 38.72,61.18
  Bottom 1.016: C40.2 38.72,51.83 38.83,53.93 C39.2
  Bottom 1.27: U$48.P$1 37.94,59.25 arc90 38.89,60.2
  Bottom 1.422: 38.83,53.93 arc90 v37.7,55.07 | 38.89,60.16 38.89,61.01 arc90 38.72,61.18
  pour Top (isolate 0.305): 28.25,66 38.75,66 38.75,64 arc-70 44,56.5 arc-70 38.75,49 38.75,47 28.25,47 28.25,48.5 25.5,48.5 25.5,64.5 28.25,64.5
N$1
  Bottom 0.254: U$1.P$5 R6.1
N$2
  Bottom 0.254: U$12.P$5 R14.1
N$3
  Bottom 0.254: U$28.P$5 R19.1
N$4
  Bottom 0.254: U$37.P$5 R24.1
N$5
  Bottom 0.254: U$46.P$5 R29.1
N$8
  Bottom 0.254: U$10.P$5 R12.1
RX_1  (via drill 0.4)
  Top 0.406: U$6.P$6 14.23,27.89 arc-11 12.86,27.76 7.27,27.51 arc-95 4.14,29.98 4.14,34.25 arc-71 6.15,37.08 arc-10 v8.66,37.72
  Bottom 0.254: U$1.P$6 9.04,37.35 arc-90 v8.66,37.72
RX_2  (via drill 0.4)
  Top 0.406: U$19.P$6 14.23,4.89 arc-11 12.86,4.76 7.27,4.51 arc-95 4.14,6.98 4.14,11.25 arc-71 6.15,14.08 arc-10 v8.66,14.72
  Bottom 0.254: U$10.P$6 9.04,14.35 arc-90 v8.66,14.72
RX_2_CABLE  (via drill 0.4)
  Top 0.254: v14.76,13.32 arc30 13.62,13.63 13.03,13.63 arc8 11.92,13.55 arc29 10.27,12.87 U$13.P$3
  Bottom 0.254: U$10.P$2 12.8,14.85 arc55 10.57,13.52 arc-26 9.73,12.59 U$13.P$3
  Bottom 0.305: U$14.P$3 arc-17 13.26,10.15 14.23,11.44 arc29 14.66,12.31 14.76,12.78 v14.76,13.32
RX_2_CABLE1  (via drill 0.4)
  Top 0.254: v14.76,36.32 arc30 13.62,36.63 13.03,36.63 arc8 11.92,36.55 arc29 10.27,35.87 U$3.P$3
  Bottom 0.254: U$1.P$2 12.8,37.85 arc55 10.57,36.52 arc-26 9.73,35.59 U$3.P$3
  Bottom 0.305: U$4.P$3 arc-17 13.26,33.15 14.23,34.44 arc29 14.66,35.31 14.76,35.78 v14.76,36.32
RX_2_CABLE2  (via drill 0.4)
  Top 0.254: v14.76,60.32 arc30 13.62,60.63 13.03,60.63 arc8 11.92,60.55 arc29 10.27,59.87 U$15.P$3
  Bottom 0.254: U$12.P$2 12.8,61.85 arc55 10.57,60.52 arc-26 9.73,59.59 U$15.P$3
  Bottom 0.305: U$16.P$3 arc-17 13.26,57.15 14.23,58.44 arc29 14.66,59.31 14.76,59.78 v14.76,60.32
RX_2_CABLE3  (via drill 0.4)
  Top 0.254: v29.24,5.68 arc30 30.38,5.37 30.97,5.37 arc8 32.08,5.45 arc29 33.73,6.13 U$29.P$3
  Bottom 0.254: U$28.P$2 31.2,4.15 arc55 33.43,5.48 arc-26 34.27,6.42 U$29.P$3
  Bottom 0.305: U$30.P$3 arc-17 30.74,8.85 29.77,7.56 arc29 29.34,6.69 29.24,6.22 v29.24,5.68
RX_2_CABLE4  (via drill 0.4)
  Top 0.254: v29.24,28.68 arc30 30.38,28.37 30.97,28.37 arc8 32.08,28.45 arc29 33.73,29.14 U$38.P$3
  Bottom 0.254: U$37.P$2 31.2,27.15 arc55 33.43,28.48 arc-26 34.27,29.41 U$38.P$3
  Bottom 0.305: U$39.P$3 arc-17 30.74,31.85 29.77,30.56 arc29 29.34,29.69 29.24,29.22 v29.24,28.68
RX_2_CABLE5  (via drill 0.4)
  Top 0.254: v29.24,52.68 arc30 30.38,52.37 30.97,52.37 arc8 32.08,52.45 arc29 33.73,53.13 U$47.P$3
  Bottom 0.254: U$46.P$2 31.2,51.15 arc55 33.43,52.48 arc-26 34.27,53.41 U$47.P$3
  Bottom 0.305: U$48.P$3 arc-17 30.74,55.85 29.77,54.56 arc29 29.34,53.69 29.24,53.22 v29.24,52.68
RX_3  (via drill 0.4)
  Top 0.406: U$22.P$6 14.23,51.89 arc-11 12.86,51.76 7.27,51.51 arc-95 4.14,53.98 4.14,58.25 arc-71 6.15,61.08 arc-10 v8.66,61.72
  Bottom 0.254: U$12.P$6 9.04,61.35 arc-90 v8.66,61.72
RX_4  (via drill 0.4)
  Top 0.406: U$32.P$6 29.77,14.11 arc-11 31.14,14.24 36.73,14.49 arc-95 39.86,12.02 39.86,7.75 arc-71 37.85,4.92 arc-10 v35.34,4.28
  Bottom 0.254: U$28.P$6 34.97,4.65 arc-90 v35.34,4.28
RX_5  (via drill 0.4)
  Top 0.406: U$41.P$6 29.77,37.11 arc-11 31.14,37.24 36.73,37.49 arc-95 39.86,35.02 39.86,30.75 arc-71 37.85,27.92 arc-10 v35.34,27.28
  Bottom 0.254: U$37.P$6 34.97,27.65 arc-90 v35.34,27.28
RX_6  (via drill 0.4)
  Top 0.406: U$50.P$6 29.77,61.11 arc-11 31.14,61.24 36.73,61.49 arc-95 39.86,59.02 39.86,54.75 arc-71 37.85,51.92 arc-10 v35.34,51.28
  Bottom 0.254: U$46.P$6 34.97,51.65 arc-90 v35.34,51.28
TX_1  (via drill 0.4)
  Top 0.406: U$6.P$5 14.51,28.78 arc-28 13.46,28.47 6.73,28.19 arc-90 4.88,30.22 4.88,34.22 arc-75 6.4,36.22 8.18,36.7 arc16 9.55,37.29 arc-18 10.37,37.62 arc-18 v13.97,37.9
  Bottom 0.305: v13.97,37.9 arc-90 13.43,37.35 U$1.P$3
TX_2  (via drill 0.4)
  Top 0.406: U$19.P$5 14.51,5.78 arc-28 13.46,5.47 6.73,5.19 arc-90 4.88,7.22 4.88,11.22 arc-75 6.4,13.22 8.18,13.7 arc16 9.55,14.29 arc-18 10.37,14.62 arc-18 v13.97,14.9
  Bottom 0.305: v13.97,14.9 arc-90 13.43,14.35 U$10.P$3
TX_2_CABLE  (via drill 0.4)
  Top 0.406: U$19.P$2 arc90 16.79,14.16 v15.5,14.16 12.86,14.16 arc0 12.12,14.13 arc31 8.66,13.04 U$13.P$4
  Bottom 0.406: R13.1 6.44,14.21 R12.2 6.97,12.73 U$13.P$4 | v15.5,14.16 arc4 15.55,13.32 arc-52 14.53,10.63 arc35 14.05,9.77 13.92,9.16 U$14.P$4
TX_2_CABLE1  (via drill 0.4)
  Top 0.406: U$6.P$2 arc90 16.79,37.16 v15.5,37.16 12.86,37.16 arc0 12.12,37.13 arc31 8.66,36.04 U$3.P$4
  Bottom 0.406: R7.1 6.44,37.21 R6.2 6.97,35.73 U$3.P$4 | v15.5,37.16 arc4 15.55,36.32 arc-52 14.53,33.63 arc35 14.05,32.77 13.92,32.16 U$4.P$4
TX_2_CABLE2  (via drill 0.4)
  Top 0.406: U$22.P$2 arc90 16.79,61.16 v15.5,61.16 12.86,61.16 arc0 12.12,61.13 arc31 8.66,60.04 U$15.P$4
  Bottom 0.406: R15.1 6.44,61.21 R14.2 6.97,59.73 U$15.P$4 | v15.5,61.16 arc4 15.55,60.32 arc-52 14.53,57.63 arc35 14.05,56.77 13.92,56.16 U$16.P$4
TX_2_CABLE3  (via drill 0.4)
  Top 0.406: U$32.P$2 arc90 27.21,4.84 v28.5,4.84 31.14,4.84 arc0 31.88,4.87 arc31 35.34,5.96 U$29.P$4
  Bottom 0.406: R20.1 37.56,4.79 R19.2 37.03,6.27 U$29.P$4 | v28.5,4.84 arc4 28.45,5.68 arc-52 29.47,8.37 arc35 29.95,9.23 30.08,9.84 U$30.P$4
TX_2_CABLE4  (via drill 0.4)
  Top 0.406: U$41.P$2 arc90 27.21,27.84 v28.5,27.84 31.14,27.84 arc0 31.88,27.86 arc31 35.34,28.96 U$38.P$4
  Bottom 0.406: R25.1 37.56,27.79 R24.2 37.03,29.27 U$38.P$4 | v28.5,27.84 arc4 28.45,28.68 arc-52 29.47,31.37 arc35 29.95,32.23 30.08,32.84 U$39.P$4
TX_2_CABLE5  (via drill 0.4)
  Top 0.406: U$50.P$2 arc90 27.21,51.84 v28.5,51.84 31.14,51.84 arc0 31.88,51.87 arc31 35.34,52.96 U$47.P$4
  Bottom 0.406: R30.1 37.56,51.79 R29.2 37.03,53.27 U$47.P$4 | v28.5,51.84 arc4 28.45,52.68 arc-52 29.47,55.37 arc35 29.95,56.23 30.08,56.84 U$48.P$4
TX_3  (via drill 0.4)
  Top 0.406: U$22.P$5 14.51,52.78 arc-28 13.46,52.47 6.73,52.19 arc-90 4.88,54.22 4.88,58.22 arc-75 6.4,60.22 8.18,60.7 arc16 9.55,61.29 arc-18 10.37,61.62 arc-18 v13.97,61.9
  Bottom 0.305: v13.97,61.9 arc-90 13.43,61.35 U$12.P$3
TX_4  (via drill 0.4)
  Top 0.406: U$32.P$5 29.49,13.22 arc-28 30.54,13.53 37.27,13.81 arc-90 39.12,11.78 39.12,7.78 arc-75 37.6,5.78 35.82,5.3 arc16 34.45,4.71 arc-18 33.63,4.38 arc-18 v30.03,4.1
  Bottom 0.305: v30.03,4.1 arc-90 30.57,4.65 U$28.P$3
TX_5  (via drill 0.4)
  Top 0.406: U$41.P$5 29.49,36.22 arc-28 30.54,36.53 37.27,36.81 arc-90 39.12,34.78 39.12,30.78 arc-75 37.6,28.78 35.82,28.3 arc16 34.45,27.71 arc-18 33.63,27.38 arc-18 v30.03,27.1
  Bottom 0.305: v30.03,27.1 arc-90 30.57,27.65 U$37.P$3
TX_6  (via drill 0.4)
  Top 0.406: U$50.P$5 29.49,60.22 arc-28 30.54,60.53 37.27,60.81 arc-90 39.12,58.78 39.12,54.78 arc-75 37.6,52.78 35.82,52.3 arc16 34.45,51.71 arc-18 33.63,51.38 arc-18 v30.03,51.1
  Bottom 0.305: v30.03,51.1 arc-90 30.57,51.65 U$46.P$3
V_CORRIENTE_1
  Bottom 0.406: U$6.P$7 17.08,26.5 16.87,26.71 15.49,26.71 13.47,24.69 10.31,24.69 9.5,25.5 9.5,27.11 9.25,27.36 U$5.3
  Bottom 0.61: U$5.3 arc90 8.38,27.4
  Bottom 0.813: 8.38,27.4 R4.2
V_CORRIENTE_2
  Bottom 0.406: U$19.P$7 17.08,3.5 16.87,3.71 15.49,3.71 13.47,1.69 10.31,1.69 9.5,2.5 9.5,4.11 9.25,4.36 U$2.3
  Bottom 0.61: U$2.3 arc90 8.38,4.4
  Bottom 0.813: 8.38,4.4 R2.2
V_CORRIENTE_3
  Bottom 0.406: U$22.P$7 17.08,50.5 16.87,50.71 15.49,50.71 13.47,48.69 10.31,48.69 9.5,49.5 9.5,51.11 9.25,51.36 U$18.3
  Bottom 0.61: U$18.3 arc90 8.38,51.4
  Bottom 0.813: 8.38,51.4 R9.2
V_CORRIENTE_4
  Bottom 0.406: U$32.P$7 26.92,15.5 27.13,15.29 28.51,15.29 30.53,17.31 33.69,17.31 34.5,16.5 34.5,14.89 34.75,14.64 U$31.3
  Bottom 0.61: U$31.3 arc90 35.62,14.6
  Bottom 0.813: 35.62,14.6 R17.2
V_CORRIENTE_5
  Bottom 0.406: U$41.P$7 26.92,38.5 27.13,38.29 28.51,38.29 30.53,40.31 33.69,40.31 34.5,39.5 34.5,37.89 34.75,37.64 U$40.3
  Bottom 0.61: U$40.3 arc90 35.62,37.6
  Bottom 0.813: 35.62,37.6 R22.2
V_CORRIENTE_6
  Bottom 0.406: U$50.P$7 26.92,62.5 27.13,62.29 28.51,62.29 30.53,64.31 33.69,64.31 34.5,63.5 34.5,61.89 34.75,61.64 U$49.3
  Bottom 0.61: U$49.3 arc90 35.62,61.6
  Bottom 0.813: 35.62,61.6 R27.2

## Text on the board
_tNames: EN | LibreServo v1.c | +7V | RX | I | GND | TX-2 | TX | TX | RX | +7V | +7V | +3V3 | GND | GND | TX | RX | +7V | GND | GND | +7V | RX | TX | GND | GND | +3V3 | +7V | +7V | RX | TX | TX | TX-2 | GND | I | RX | +7V | LibreServo v1.c | EN | EN | LibreServo v1.c | +7V | RX | I | GND | TX-2 | TX | TX | RX | +7V | +7V | +3V3 | GND | GND | TX | RX | +7V | GND | GND | +7V | RX | TX | GND | GND | +3V3 | +7V | +7V | RX | TX | TX | TX-2 | GND | I | RX | +7V | LibreServo v1.c | EN | EN | LibreServo v1.c | +7V | RX | I | GND | TX-2 | TX | TX | RX | +7V | +7V | +3V3 | GND | GND | TX | RX | +7V | GND | GND | +7V | RX | TX | GND | GND | +3V3 | +7V | +7V | RX | TX | TX | TX-2 | GND | I | RX | +7V | LibreServo v1.c | EN
_bNames: TX | +7V | GND | TX | RX | RX | +7V | +7V | GND | EN | GND | I | RX | +3V3 | TX-2 | TX | +7V | GND | +7V | TX | RX | 2x | 2x | LibreServo v1.c | TX | RX | GND | +7V | GND | GND | +7V | GND | RX | TX | LibreServo v1.c | 2x | 2x | RX | TX | +7V | GND | +7V | TX | TX-2 | +3V3 | RX | I | GND | EN | GND | +7V | +7V | RX | RX | TX | GND | +7V | TX | TX | +7V | GND | TX | RX | RX | +7V | +7V | GND | EN | GND | I | RX | +3V3 | TX-2 | TX | +7V | GND | +7V | TX | RX | 2x | 2x | LibreServo v1.c | TX | RX | GND | +7V | GND | GND | +7V | GND | RX | TX | LibreServo v1.c | 2x | 2x | RX | TX | +7V | GND | +7V | TX | TX-2 | +3V3 | RX | I | GND | EN | GND | +7V | +7V | RX | RX | TX | GND | +7V | TX | TX | +7V | GND | TX | RX | RX | +7V | +7V | GND | EN | GND | I | RX | +3V3 | TX-2 | TX | +7V | GND | +7V | TX | RX | 2x | 2x | LibreServo v1.c | TX | RX | GND | +7V | GND | GND | +7V | GND | RX | TX | LibreServo v1.c | 2x | 2x | RX | TX | +7V | GND | +7V | TX | TX-2 | +3V3 | RX | I | GND | EN | GND | +7V | +7V | RX | RX | TX | GND | +7V | TX
_bValues: SN74LVC2 | SN74LVC2 | SN74LVC2 | SN74LVC2 | SN74LVC2 | SN74LVC2